# Altium PCB AdamPannel.PcbDoc (part 2 of 3)
Units mil, origin at the board's own origin, x right, y up, seen from the top; angles counter-clockwise.
Board outline 4173.23 x 3149.71 mil, 2 copper layers (Top Layer, Bottom Layer); 88 components, 73 nets, 388 pads, 166 vias.
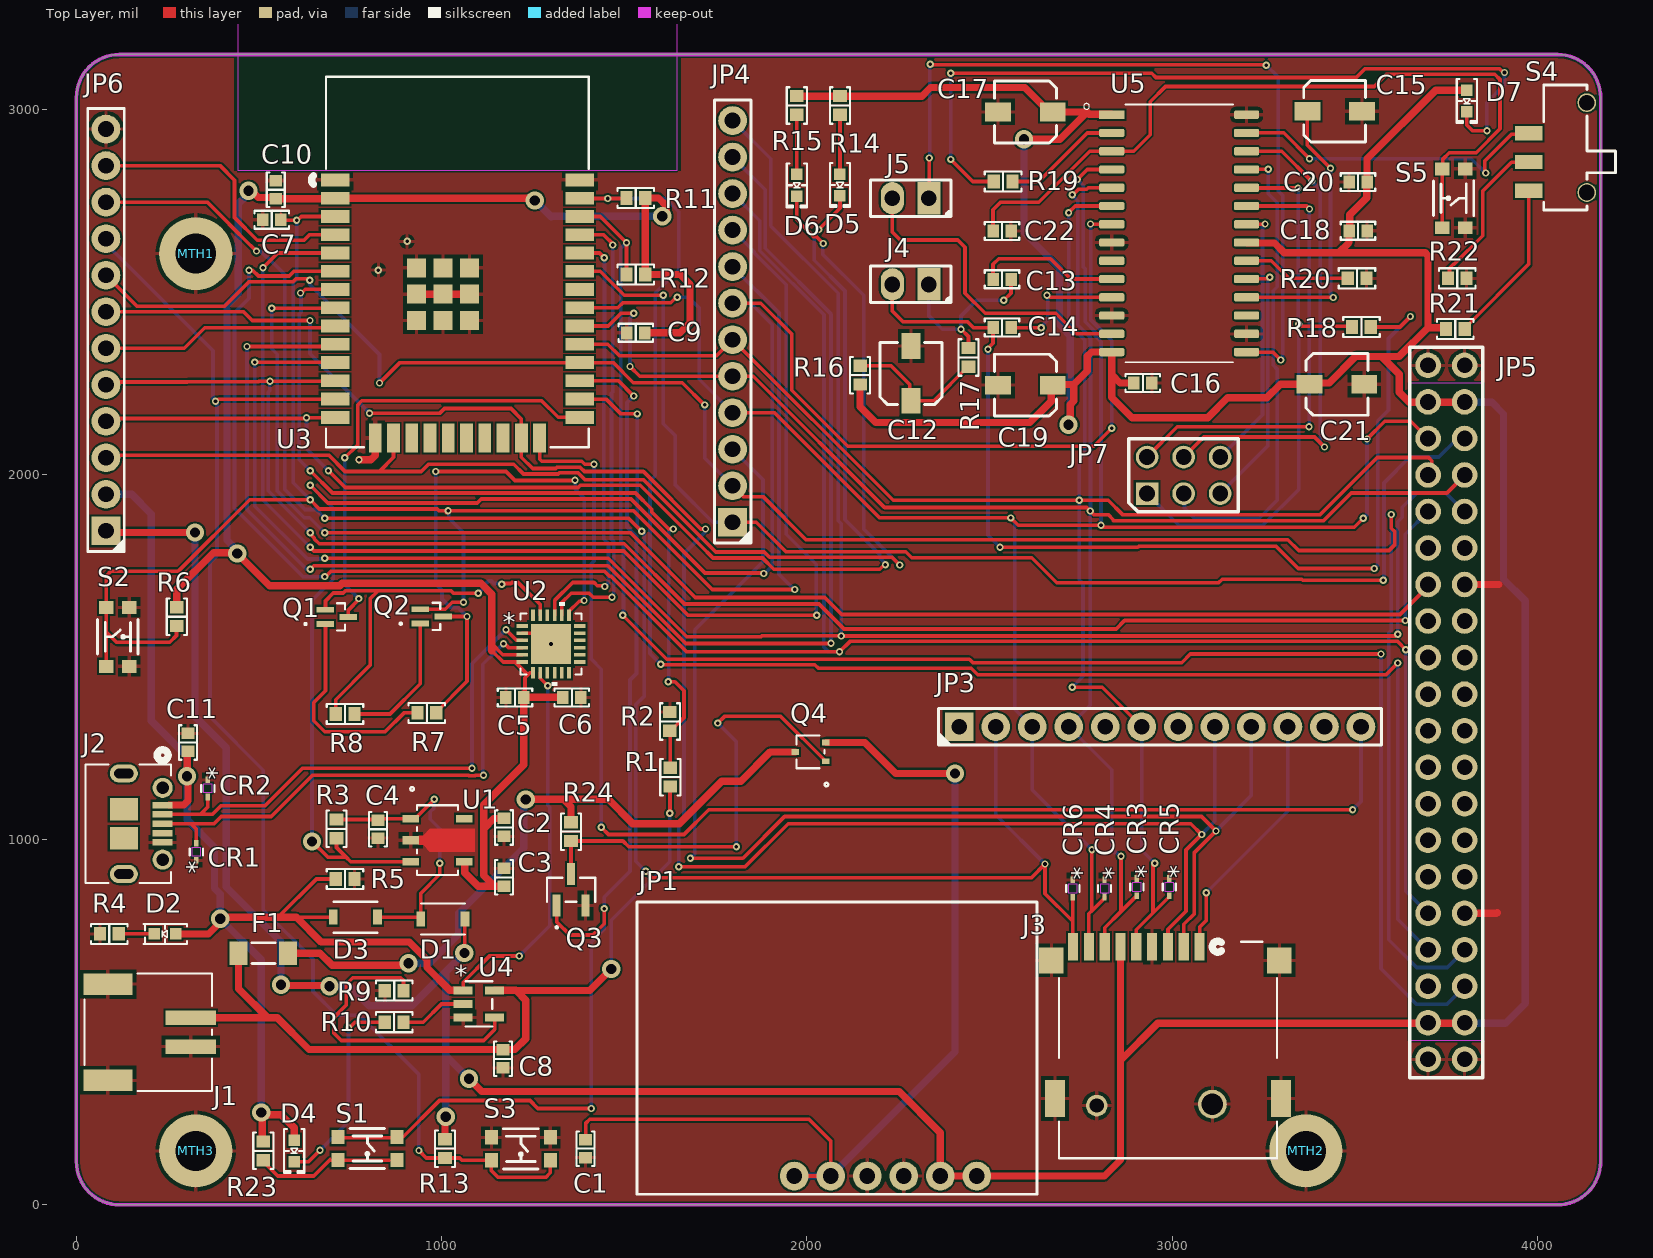
[diagram p0: Top Layer view]

## Via types
v1: diameter 20, hole 10, Top Layer to Bottom Layer, 146 vias
v2: diameter 50, hole 28, Top Layer to Bottom Layer, 20 vias

## Nets (pads, with @x,y where several pads share a name; then routed paths per layer and width w, separated by ;. In a path a pad name is that pad's centre, name@x,y a point inside that pad or via, vN(x,y) a via of type N, cw(c..) or ccw(c..) an arc to the next point about the centre after c; other vN are vias at no path point) (continued)
"CD SW1": (continued)
  Bottom Layer w10: v1(492.94,2611.17) 503.77,2611.17 521,2593.94 524.06,2593.94 570,2547.99 570,1959.34 625.63,1903.71 656.29,1903.71 v1(680,1880) ; v1(1535.43,2165.35) 1535.43,1859.12 1547.51,1847.04 v1(1547.51,1844.33) 1555.12,1836.72 1555.12,1393.19 1531.5,1369.57 1531.5,940.94 v1(1559.06,913.39) ; JP3.2@2516.93,1309.06 2516.93,1068.08 v1(2652.1,932.91)